# EAGLE board board (EAGLE 6.6.0)
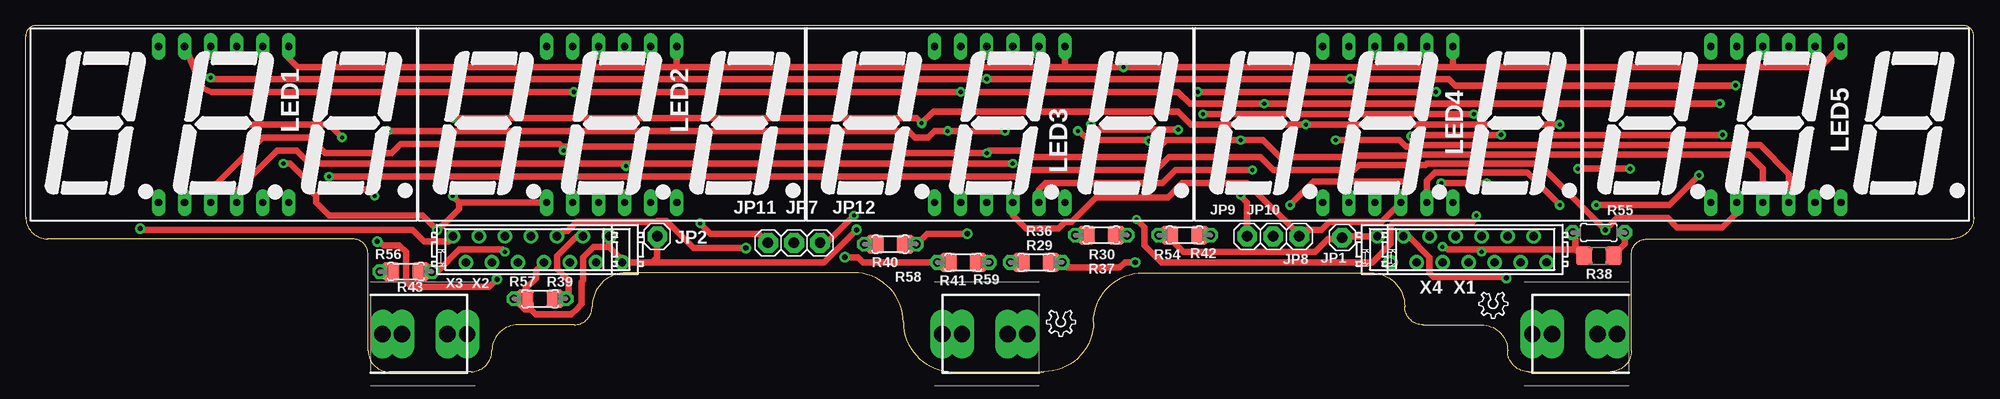
[diagram p0: board, top side]
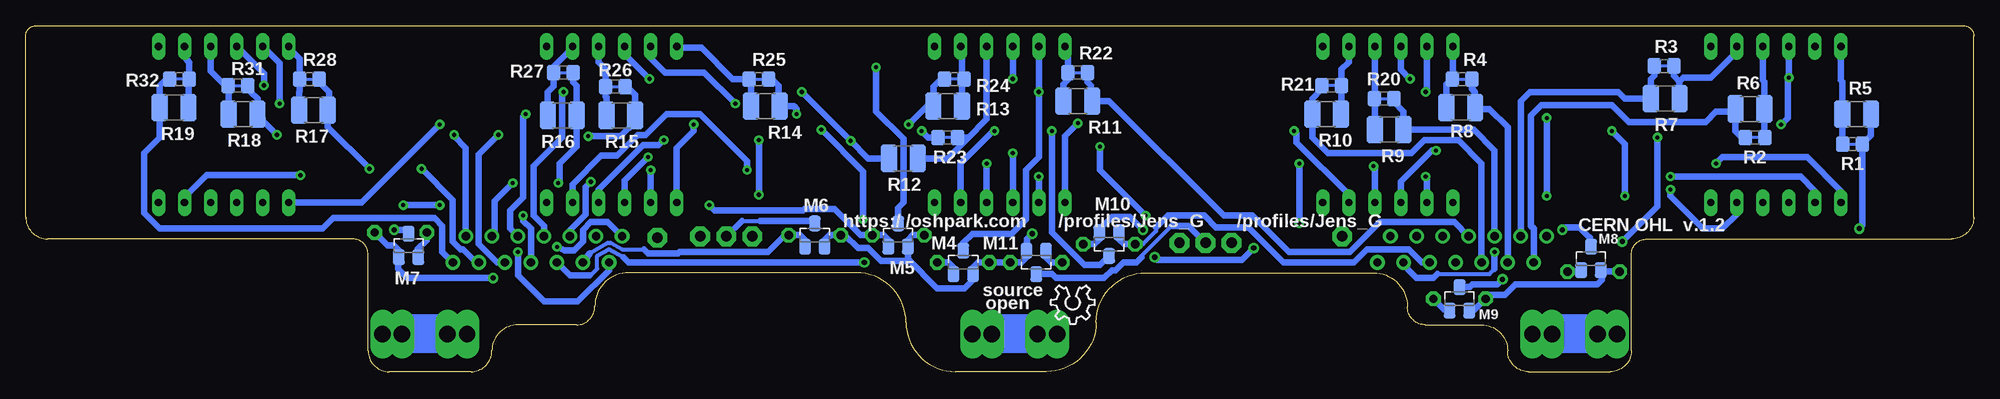
[diagram p1: board, bottom side, seen from below]

Size 189.99 x 33.78 mm. Coordinates in mm from the lower left corner, seen from the top.
Outline: 189.99,32.77 arc90 188.98,33.78 1.02,33.78 arc90 0,32.77 0,15.11 arc90 2.16,12.95 31.88,12.95 arc-90 33.4,11.43 33.4,2.03 arc90 35.43,0 43.43,0 arc90 45.47,2.03 arc-90 48.01,4.57 53.47,4.57 arc90 55.25,6.35 arc-90 58.55,9.65 80.77,9.65 arc-90 85.6,4.83 arc90 90.42,0 99.31,0 arc90 104.14,4.83 arc-90 108.97,9.65 131.19,9.65 arc-90 134.49,6.35 arc90 136.27,4.57 141.99,4.57 arc-90 144.53,2.03 arc90 146.56,0 154.56,0 arc90 156.59,2.03 156.59,11.43 arc-90 158.12,12.95 187.83,12.95 arc90 189.99,15.11 189.99,32.77
Copper layers (1*16): Top 0.035mm / dielectric 1.5mm / Bottom 0.035mm
Design rules "OSHPark-8mil-2layer": minimum track width 10mil, minimum drill 15mil, track to track 8mil, track to pad 8mil, pad to pad 8mil, via to via 8mil, smd to smd 8mil, copper to edge 8mil, drill to drill 8mil, minimum pad ring 12mil, minimum via ring 10mil, stop-mask expansion 4mil, vias tented up to drill 20mil, thermal gap 10mil

## Footprints (pad centres in the part's own frame; a part is rotated, then mirrored left to right if it is on the bottom)
BATTERY-AAA-LEFT = drill 1.6 long: P1 -2.413,0; P2 3.937,0; P3 2.032,0; P4 -4.318,0
BATTERY-AAA-RIGHT = drill 1.6 long: M1 -3.937,0; M2 2.413,0; M3 4.318,0; M4 -2.032,0
1X01 = drill 1.016 pad 1.93 octagon: 1 0,0
BX56-12 = drill 0.7 pad 1.27 long: 1 -6.35,-7.62; 2 -3.81,-7.62; 3 -1.27,-7.62; 4 1.27,-7.62; 5 3.81,-7.62; 6 6.35,-7.62; 7 6.35,7.62; 8 3.81,7.62; 9 1.27,7.62; 10 -1.27,7.62; 11 -3.81,7.62; 12 -6.35,7.62
SOT-23 = smd 1.143 x 1.524: 1 0.953,1.143; 2 -0.953,1.143; 3 0,-1.143
R0805 = smd 1.3 x 1.5: 1 -0.95,0; 2 0.95,0
R1210 = smd 1.6 x 2.7: 1 -1.4,0; 2 1.4,0
0204/5 = drill 0.813 octagon: 1 -2.54,0; 2 2.54,0
R1206 = smd 1.6 x 1.803: 1 -1.422,0; 2 1.422,0
MICROMATCH-12 = drill 0.813: 1 6.985,-1.27; 2 5.715,1.27; 3 4.445,-1.27; 4 3.175,1.27; 5 1.905,-1.27; 6 0.635,1.27; 7 -0.635,-1.27; 8 -1.905,1.27; 9 -3.175,-1.27; 10 -4.445,1.27; 11 -5.715,-1.27; 12 -6.985,1.27
MICROMATCH-14 = drill 0.813: 1 8.255,-1.27; 2 6.985,1.27; 3 5.715,-1.27; 4 4.445,1.27; 5 3.175,-1.27; 6 1.905,1.27; 7 0.635,-1.27; 8 -0.635,1.27; 9 -1.905,-1.27; 10 -3.175,1.27; 11 -4.445,-1.27; 12 -5.715,1.27; 13 -6.985,-1.27; 14 -8.255,1.27

## Placement (x,y rotation side)
BH4  HOLDER_AAA_LEFT1  [BATTERY-AAA-LEFT]  151.26,3.68 0 top
BH5  HOLDER_AAA_LEFT1  [BATTERY-AAA-LEFT]  93.73,3.68 0 top
BH6  HOLDER_AAA_RIGHT  [BATTERY-AAA-RIGHT]  38.73,3.68 0 top
JP1  [1X01]  128.4,13.08 0 top
JP2  [1X01]  61.59,13.21 0 top
JP7  [1X01]  74.93,12.57 0 top
JP8  [1X01]  124.21,13.21 0 top
JP9  [1X01]  119.13,13.21 0 top
JP10  [1X01]  121.67,13.21 0 top
JP11  [1X01]  72.39,12.57 0 top
JP12  [1X01]  77.47,12.57 0 top
LED1  BC56-12SRWA  [BX56-12]  19.3,24.13 0 top
LED2  BC56-12SRWA  [BX56-12]  57.15,24.13 0 top
LED3  BC56-12SRWA  [BX56-12]  95,24.13 0 top
LED4  BC56-12SRWA  [BX56-12]  132.84,24.13 0 top
LED5  BC56-12SRWA  [BX56-12]  170.69,24.13 0 top
LOGO1  OSHW_LOGO_8MILX0150-NT  [OSHW_8X150_NOTEXT]  85.75,8.43 180 bottom
LOGO2  OSHW_LOGO_6MILX0100-NT  [OSHW_6X100_NOTEXT]  102.36,5.97 180 top
LOGO3  OSHW_LOGO_6MILX0100-NT  [OSHW_6X100_NOTEXT]  144.53,7.75 180 top
M4  IRLML2244  [SOT-23]  98.55,10.67 180 bottom
M5  IRLML2244  [SOT-23]  104.9,13.34 180 bottom
M6  IRLML2244  [SOT-23]  113.03,13.34 180 bottom
M7  IRLML2244  [SOT-23]  152.65,12.32 180 bottom
M8  IRLML2244  [SOT-23]  37.34,11.05 180 bottom
M9  IRLML2244  [SOT-23]  50.17,7.11 180 bottom
M10  IRLML2244  [SOT-23]  84.33,12.45 0 bottom
M11  IRLML2244  [SOT-23]  91.44,10.67 0 bottom
R1  22  [R0805]  11.81,22.23 0 bottom
R2  22  [R0805]  21.34,22.86 180 bottom
R3  22  [R0805]  30.23,29.84 180 bottom
R4  22  [R0805]  49.91,28.57 0 bottom
R5  22  [R1210]  11.43,25.15 0 bottom
R6  22  [R1210]  21.84,25.65 180 bottom
R7  22  [R1210]  30.1,26.67 180 bottom
R8  22  [R1210]  50.04,25.78 0 bottom
R9  22  [R1210]  57.02,23.62 0 bottom
R10  22  [R1210]  63.12,25.15 180 bottom
R11  22  [R1210]  87.38,26.42 0 bottom
R12  22  [R1210]  104.39,20.83 180 bottom
R13  22  [R1210]  100.08,25.91 180 bottom
R14  22  [R1210]  117.86,25.91 0 bottom
R15  22  [R1210]  131.95,25.02 0 bottom
R16  22  [R1210]  137.67,25.02 0 bottom
R17  22  [R1210]  161.93,25.53 0 bottom
R18  22  [R1210]  168.78,25.15 0 bottom
R19  22  [R1210]  175.51,25.78 180 bottom
R20  22  [R0805]  57.53,26.67 0 bottom
R21  22  [R0805]  62.61,27.94 180 bottom
R22  22  [R0805]  87.38,29.21 0 bottom
R23  22  [R0805]  100.08,22.86 180 bottom
R24  22  [R0805]  99.44,28.57 180 bottom
R25  22  [R0805]  118.49,28.57 0 bottom
R26  22  [R0805]  132.46,27.81 0 bottom
R27  22  [R0805]  137.54,29.21 0 bottom
R28  22  [R0805]  162.31,28.57 0 bottom
R29  3k3  [0204/5]  98.55,10.67 0 top
R30  3k3  [0204/5]  104.9,13.34 0 top
R31  22  [R0805]  169.29,27.94 0 bottom
R32  22  [R0805]  175.01,28.57 180 bottom
R36  3k3  [R1206]  98.55,10.67 0 top
R37  3k3  [R1206]  104.9,13.34 0 top
R38  3k3  [R1206]  153.42,11.3 0 top
R39  3k3  [R1206]  50.17,7.11 0 top
R40  3k3  [R1206]  84.33,12.45 180 top
R41  3k3  [R1206]  91.44,10.67 180 top
R42  3k3  [R1206]  113.03,13.34 0 top
R43  3k3  [R1206]  37.08,9.78 0 top
R54  3k3  [0204/5]  113.03,13.34 0 top
R55  3k3  [0204/5]  153.42,13.59 0 top
R56  3k3  [0204/5]  37.08,9.78 0 top
R57  3k3  [0204/5]  50.17,7.11 0 top
R58  3k3  [0204/5]  84.33,12.45 180 top
R59  3k3  [0204/5]  91.44,10.67 180 top
X1  MICROMATCH-12  [MICROMATCH-12]  141.35,11.94 180 top
X2  MICROMATCH-14  [MICROMATCH-14]  49.91,11.94 180 top
X3  MICROMATCH-12  [MICROMATCH-12]  48.64,11.94 180 top
X4  MICROMATCH-14  [MICROMATCH-14]  140.08,11.94 180 top

## Library data of the parts
BH4-BH6 = SparkFun-Electromechanical
JP1 JP2 JP7-JP12 = adafruit
LED1-LED5 = display-kingbright-1
LOGO1-LOGO3 = ohw-logo
M4-M11 = IRLML6402
R1-R32 R36-R43 R54-R59 = rcl
X1 X3 = Con-amp-micromatch; MF: FARNELL; MPN: 8-215464-2; OC_FARNELL: 3784666; OC_NEWARK: 95H9857
X2 X4 = Con-amp-micromatch; MF: FARNELL; MPN: 8-215464-4; OC_FARNELL: 3784678; OC_NEWARK: 19J6431

## Nets
CA_LED: JP1.1 JP2.1 M4.2 M5.2 M6.2 M7.2 M8.2 M9.2 M10.2 M11.2 R29.1 R30.1 R36.1 R37.1 R38.1 R39.1 R40.1 R41.1 R42.1 R43.1 R54.1 R55.1 R56.1 R57.1 R58.1 R59.1 X2.8 X2.13 X2.14 X3.8 X4.1 X4.2
D0_A: R1.2 R5.2 X2.1 X3.1
D1_A: R2.2 R6.2 X2.2 X3.2
D2_A: R3.2 R7.2 X2.3 X3.3
D3_A: R4.2 R8.2 X2.4 X3.4
D4_A: R9.2 R20.2 X2.5 X3.5
D5_A: R10.2 R21.2 X2.6 X3.6
D6_A: R11.2 R22.2 X2.7 X3.7
D7_A: R12.2 R23.2 X1.5 X4.7
D8_A: R13.2 R24.2 X1.6 X4.8
D9_A: R14.2 R25.2 X1.7 X4.9
D10_A: R15.2 R26.2 X1.8 X4.10
D11_A: R16.2 R27.2 X1.9 X4.11
D12_A: R17.2 R28.2 X1.10 X4.12
D13_A: R18.2 R31.2 X1.11 X4.13
D14_A: R19.2 R32.2 X1.12 X4.14
DIG_0: LED1.12 R1.1 R5.1
DIG_1: LED1.9 R2.1 R6.1
DIG_2: LED1.8 R3.1 R7.1
DIG_3: LED2.12 R4.1 R8.1
DIG_4: LED2.9 R9.1 R20.1
DIG_5: LED2.8 R10.1 R21.1
DIG_6: LED3.12 R11.1 R22.1
DIG_7: LED3.9 R12.1 R23.1
DIG_8: LED3.8 R13.1 R24.1
DIG_9: LED4.12 R14.1 R25.1
DIG_10: LED4.9 R15.1 R26.1
DIG_11: LED4.8 R16.1 R27.1
DIG_12: LED5.12 R17.1 R28.1
DIG_13: LED5.9 R18.1 R31.1
DIG_14: LED5.8 R19.1 R32.1
IO-A: M4.1 R29.2 R36.2 X1.4 X4.6
IO-B: M5.1 R30.2 R37.2 X1.3 X4.5
IO-C: M6.1 R42.2 R54.2 X1.2 X4.4
IO-D: M7.1 R38.2 R55.2 X1.1 X4.3
IO-DP: M11.1 R41.2 R59.2 X2.9 X3.9
IO-E: M8.1 R43.2 R56.2 X2.12 X3.12
IO-F: M9.1 R39.2 R57.2 X2.11 X3.11
IO-G: M10.1 R40.2 R58.2 X2.10 X3.10
NC1: BH4.P1 BH4.P2 BH4.P3 BH4.P4
NC2: BH5.P1 BH5.P2 BH5.P3 BH5.P4
NC3: BH6.M1 BH6.M2 BH6.M3 BH6.M4
SEG_A: LED1.11 LED2.11 LED3.11 LED4.11 LED5.11 M4.3
SEG_B: LED1.7 LED2.7 LED3.7 LED4.7 LED5.7 M5.3
SEG_C: JP8.1 JP11.1 LED1.4 LED2.4 LED3.4 LED4.4 LED5.4
SEG_C_SOURCE: JP10.1 M6.3
SEG_D: LED1.2 LED2.2 LED3.2 LED4.2 LED5.2 M7.3
SEG_DP: JP9.1 JP12.1 LED1.3 LED2.3 LED3.3 LED4.3 LED5.3
SEG_DP_SOURCE: JP7.1 M11.3
SEG_E: LED1.1 LED2.1 LED3.1 LED4.1 LED5.1 M8.3
SEG_F: LED1.10 LED2.10 LED3.10 LED4.10 LED5.10 M9.3
SEG_G: LED1.5 LED2.5 LED3.5 LED4.5 LED5.5 M10.3

## Tracks (layer width: path | path; a pad name or v marks a point on that pad's centre or on a via)
CA_LED  (via drill 0.41, 0.51)
  Top 0.254: 49.28,7.62 R39.1
  Top 0.406: 53.72,6.22 53.72,6.1 | 124.84,11.81 124.84,11.68
  Top 0.61: R43.1 R56.1 | 61.09,10.67 77.85,10.67 v81.03,13.84 | 61.09,10.67 X2.14 58.17,10.92 56.9,12.19 | R36.1 R29.1 | R37.1 103.48,13.36 103.38,13.46 102.49,13.46 R30.1 | R54.1 111.23,13.31 R42.1 111.78,13.17 111.78,12.79 112.89,11.68 124.84,11.68 125.73,11.68 127,12.95 127.76,12.95 | 56.9,12.19 55.37,12.19 54.36,11.18 54.36,8.89 54.23,8.76 54.23,6.6 53.72,6.1 53.21,5.59 49.73,5.59 49.23,6.1 48.64,6.1 R57.1 R39.1 | X4.1 127.76,13.21 127.76,12.95 | JP2.1 61.59,11.18 61.09,10.67 | R58.1 R40.1 | R58.1 86.28,12.45 | 49.23,6.63 R39.1 | 48.64,7.21 R39.1 | R41.1 R59.1 | v91.82,13.46 87.88,13.46 R58.1 | v138.18,12.19 138.68,11.94 141.99,11.94 | 127.76,12.95 128.27,12.95 JP1.1 | X2.8 49.78,9.91 49.78,9.12 48.77,8.11 48.77,7.14 R39.1 | 141.99,11.94 151.13,11.94 | 151.13,11.94 151.38,11.68 151.61,11.68 R38.1 | 151.13,11.94 151.13,13.34 R55.1 | 56.9,12.19 X2.13 | v141.99,11.68 141.99,11.94
  Bottom 0.254: M8.2 35.92,9.91 35.92,9.78
  Bottom 0.61: M8.2 36.27,9.7 36.27,8.94 36.7,8.51 44.7,8.51 45.72,7.49 47.24,7.49 R57.1 48.64,6.1 M9.2 | v81.03,13.84 82.3,15.11 84.07,15.11 85.27,13.92 M10.2 85.27,12.93 R40.1 R58.1 85.85,12.45 | 36.14,9.78 35.92,9.78 R56.1 | R30.1 R37.1 103.96,12.85 M5.2 103.96,12.31 103.96,11 | 103.96,11 101.09,8.13 98.42,8.13 97.66,8.89 97.66,9.6 M4.2 97.61,10.19 R36.1 R29.1 R59.1 R41.1 92.38,11.15 M11.2 92.33,11.73 92.33,12.95 v91.82,13.46 | 111.45,13.28 R54.1 | 103.96,11 104.16,10.79 106.55,10.79 107.82,12.06 108.84,12.06 110.11,13.34 R54.1 | v138.18,12.19 137.41,11.81 136.53,11.81 135.64,12.7 135.64,13.84 134.87,14.61 133.22,14.61 X4.1 | v141.99,11.68 141.99,9.4 139.45,6.86 136.14,6.86 133.1,9.91 X4.2 | 151.64,11.3 M7.2 151.74,11.3 151.74,11.96 150.88,12.83 R55.1 | M6.2 112.08,12.87 R42.1 R54.1
D0_A  (via drill 0.51)
  Top 0.406: 41.4,12.95 41.53,12.95
  Top 0.61: v11.18,13.97 11.3,13.84 37.72,13.84 38.86,12.7 41.27,12.7 41.53,12.95 41.78,13.21 X2.1
  Bottom 0.61: R5.2 10.03,23.06 R1.2 10.86,14.29 v11.18,13.97
D1_A
  Bottom 0.61: X2.2 42.93,13.97 43.18,14.22 43.18,25.02 42.16,26.04 35.31,26.04 33.66,24.38 26.16,24.38 25.15,25.4 23.5,25.4 R6.2 23.24,25.02 23.24,23.5 22.61,22.86 R2.2
D2_A
  Bottom 0.61: R7.2 31.5,26.03 | X2.3 44.2,26.42 43.31,27.3 34.67,27.3 34.04,26.67 R7.2 | R3.2 31.18,28.89 31.5,28.57 R7.2
D3_A
  Bottom 0.61: X2.4 45.47,23.88 47.24,25.65 48.51,25.65 R8.2 | R8.2 48.64,25.4 | R4.2 48.96,27.62 48.64,27.3 R8.2
D4_A
  Bottom 0.61: X2.5 46.74,21.59 48.77,23.62 R9.2 55.63,25.4 56.58,26.36 R20.2
D5_A
  Bottom 0.61: X2.6 48.01,20.32 50.29,22.61 53.59,22.61 54.86,21.34 62.99,21.34 64.52,22.86 R10.2 64.52,26.67 63.56,27.62 R21.2
D6_A
  Bottom 0.61: R22.2 86.43,28.26 86.11,27.94 86.11,26.55 R11.2 84.33,26.42 73.15,15.24 70.36,15.24 66.8,11.68 60.83,11.68 57.91,14.61 50.67,14.61 X2.7
D7_A  (via drill 0.41)
  Top 0.61: v137.54,27.3 v114.3,27.3 | v102.62,23.5 102.74,23.5 103.63,22.61 109.47,22.61 v109.54,22.54
  Bottom 0.61: v114.3,27.3 v109.54,22.54 107.82,20.83 R12.2 | R23.2 101.98,22.86 v102.62,23.5 | X4.7 139.45,14.22 140.46,15.24 140.46,20.07 137.67,22.86 137.67,27.18 v137.54,27.3
D8_A  (via drill 0.41)
  Top 0.61: v108.33,14.86 109.09,14.1 109.09,12.32 110.74,10.67 131.32,10.67 133.1,12.45 133.1,14.22 133.48,14.61 141.1,14.61 141.48,14.99 v141.48,15.24 | v112.39,23.62 104.39,23.62 v103.89,24.13
  Bottom 0.61: v108.33,14.86 108.33,19.56 v112.39,23.62 | v103.89,24.13 102.11,25.91 R13.2 101.48,27.81 100.71,28.57 R24.2 | X4.8 140.72,13.97 141.48,14.73 v141.48,15.24
D9_A  (via drill 0.41)
  Top 0.61: v141.22,25.15 v114.81,25.15
  Bottom 0.61: R14.2 116.46,25.78 | v114.81,25.15 114.81,25.65 115.06,25.91 R14.2 | R25.2 117.22,28.57 116.59,27.94 116.59,26.04 R14.2 | v141.22,25.15 141.48,24.89 141.48,17.02 142.75,15.75 142.75,13.97 X4.9
D10_A  (via drill 0.41)
  Top 0.61: v143.89,23.11 135.25,23.11 v135.13,22.99
  Bottom 0.61: R26.2 131.32,27.81 130.55,27.05 R15.2 130.55,24.39 131.95,22.99 v135.13,22.99 | X4.10 144.02,10.67 145.8,12.45 145.8,21.21 v143.89,23.11
D11_A  (via drill 0.41)
  Top 0.61: v142.49,18.41 v138.05,18.41
  Bottom 0.61: R27.2 136.59,28.26 136.27,27.94 R16.2 | R16.2 | R16.2 136.27,21.97 137.92,20.32 137.92,18.54 v138.05,18.41 | v142.49,18.41 144.27,16.64 144.27,13.46 X4.11
D12_A  (via drill 0.41)
  Top 0.61: v151.38,19.81 v156.46,19.81
  Bottom 0.61: R28.2 161.36,28.26 160.4,27.3 160.4,25.65 R17.2 160.53,23.87 v156.46,19.81 | X4.12 146.05,10.67 147.32,11.94 147.57,11.94 148.34,12.7 148.34,16.76 v151.38,19.81
D13_A  (via drill 0.41)
  Top 0.61: v148.21,23.11 v165.48,23.11
  Bottom 0.61: R18.2 167.26,25.15 | 166.88,24.64 R18.2 | X4.13 147.07,21.84 148.21,22.99 v148.21,23.11 | R31.2 168.02,27.94 168.02,27.3 167.39,26.67 R18.2 | R18.2 167.39,24.77 167.13,24.77 v165.48,23.11
D14_A
  Bottom 0.61: R32.2 176.28,28.57 176.91,27.94 R19.2 176.91,22.86 178.44,21.34 178.44,15.49 176.91,13.97 161.04,13.97 160.02,14.99 150.11,14.99 149.35,14.22 149.35,11.68 X4.14
DIG_0
  Bottom 0.61: LED1.12 12.95,28.45 12.83,28.32 R5.1 12.83,22.29 R1.1
DIG_1
  Bottom 0.61: LED1.9 20.57,28.45 20.44,28.32 R6.1 20.44,23.55 R2.1
DIG_2
  Bottom 0.61: R7.1 28.7,28.32 | 28.7,28.32 28.32,28.7 25.65,28.7 23.11,31.24 LED1.8 | R3.1 29.28,28.9 28.7,28.32
DIG_3
  Bottom 0.61: R8.1 51.44,28.06 51.05,28.45 50.8,28.83 | LED2.12 50.8,28.83 | R4.1 50.8,28.83
DIG_4
  Bottom 0.61: R9.1 58.42,25.4 58.42,25.65 58.42,26.48 | LED2.9 58.42,26.48 | 58.42,26.48 R20.1
DIG_5
  Bottom 0.61: R10.1 61.34,25.52 61.34,26.04 61.66,26.36 R21.1 61.66,29.52 60.96,30.23 LED2.8
DIG_6
  Bottom 0.61: R11.1 88.78,28.06 88.33,28.51 R22.1 88.33,31.43 LED3.12
DIG_7
  Bottom 0.61: 98.11,22.8 96.27,24.64 LED3.9 | 98.11,22.8 100.08,20.83 R12.1 | R23.1 98.17,22.86 98.11,22.8
DIG_8
  Bottom 0.61: R13.1 98.68,28.76 | 98.68,28.76 R24.1 | 98.68,28.76 98.68,31.62 LED3.8
DIG_9
  Bottom 0.61: R14.1 119.26,28.39 R25.1 | R25.1 119.44,28.25 119.38,28.19 | LED4.12 126.11,31.62 124.08,31.62 121.03,28.57 R25.1
DIG_10
  Bottom 0.61: R15.1 133.35,26.8 133.41,26.86 R26.1 133.41,29.52 134.11,30.23 LED4.9
DIG_11
  Bottom 0.61: R16.1 139.07,27.3 138.49,27.88 R27.1 138.49,29.78 136.65,31.62 LED4.8
DIG_12
  Bottom 0.61: 162.94,24.64 163.07,24.77 163.07,25.27 R17.1 163.33,27.3 163.26,27.37 R28.1 163.26,30.54 164.34,31.62 LED5.12
DIG_13
  Bottom 0.61: LED5.9 171.96,29.34 170.18,27.56 | R18.1 170.18,27.56 | 170.18,27.56 170.18,27.88 R31.1
DIG_14
  Bottom 0.61: R19.1 174.11,27.94 173.93,28.13 | 173.93,28.13 173.74,28.32 | LED5.8 174.5,30.73 174.06,30.16 R32.1 174.06,28.26 173.93,28.13
IO-A  (via drill 0.51)
  Top 0.61: R36.2 R29.2 101.6,10.16 106.68,10.16 107.19,10.67 v108.2,10.67
  Bottom 0.406: 131.7,11.18 133.1,11.94 134.24,11.3 134.24,10.03 134.87,9.4 135,9.4
  Bottom 0.61: M4.1 99.49,10.19 R36.2 R29.2 | v108.2,10.67 131.19,10.67 131.7,11.18 | 135,9.4 136.91,9.4 X4.6
IO-B  (via drill 0.41)
  Top 0.61: R37.2 R30.2 | v134.87,18.54 125.6,18.54 v123.32,16.26
  Bottom 0.61: M5.1 105.84,12.85 R37.2 R30.2 108.58,13.34 111.12,15.88 114.05,15.88 114.17,15.75 122.81,15.75 v123.32,16.26 | X4.5 136.91,13.84 135.38,15.37 135.38,18.03 v134.87,18.54
IO-C
  Top 0.61: R42.2 115.09,13.31 R54.2
  Bottom 0.406: 129.67,11.94 131.83,11.94 132.97,12.57 133.22,12.57 135,11.56
  Bottom 0.61: 115.19,13.31 115.59,13.31 | 115.59,13.31 115.68,13.31 R54.2 R42.2 113.98,12.87 M6.1 | 115.59,13.31 116.1,13.19 117.6,11.68 126.24,11.68 126.36,11.56 129.29,11.56 129.67,11.94 | 135,11.56 X4.4
IO-D  (via drill 0.51 pad 0.25)
  Top 0.61: X4.3 134.87,13.21 136.91,11.18 136.91,9.65 137.29,9.27 144.27,9.27 v144.4,9.14 | R38.2 154.84,11.33 155.96,12.45 R55.2
  Bottom 0.61: v144.4,9.14 152.78,9.14 153.67,10.03 153.67,10.72 153.72,11.3 M7.1 153.61,11.87 154.05,12.32 154.69,12.32 R55.2 155.83,13.46
IO-DP  (via drill 0.51, 0.51 pad 0.25)
  Top 0.406: 61.59,14.73 60.71,14.73 60.58,14.61
  Top 0.61: R41.2 R59.2 81.66,10.67 81.15,11.18 v79.88,11.18 | v70.23,12.06 65.15,12.06 62.48,14.73 61.59,14.73 | 60.58,14.61 53.72,14.61 52.83,13.72 52.32,13.72 X2.9
  Bottom 0.61: R59.2 R41.2 90.49,11.14 M11.1 | v79.88,11.18 79.63,10.92 71.37,10.92 v70.23,12.06
IO-E  (via drill 0.4)
  Top 0.61: R43.2 R56.2 40,9.91 40.26,9.91 42.29,11.94 46.48,11.94 v46.74,11.68
  Bottom 0.406: 52.32,9.53 47.24,9.53 46.74,10.03
  Bottom 0.61: R56.2 38.79,9.78 M8.1 | 52.32,9.53 52.7,9.14 54.36,9.14 55.63,10.41 X2.12 | 46.74,10.03 v46.74,11.68
IO-F
  Top 0.61: R39.2 R57.2 52.96,7.37 52.96,8.89 51.82,10.03 51.82,11.3 53.72,13.21 X2.11
  Bottom 0.61: M9.1 51.69,6.1 R57.2
IO-G
  Top 0.61: R40.2 R58.2
  Bottom 0.406: R58.2 81.03,12.45 79.76,13.72 79.76,14.1
  Bottom 0.61: 79.76,14.1 78.61,15.24 75.06,15.24 73.91,14.1 70.74,14.1 67.31,10.67 60.45,10.67 59.18,11.94 55.12,11.94 53.85,10.67 X2.10 | M10.1 83.39,12.93 R40.2 R58.2
NC1
  Bottom 0.61: BH4.P1 148.59,3.68 | BH4.P2 155.07,3.68
  Bottom 2.184: 148.72,3.68 148.59,3.68 BH4.P4 | BH4.P3 155.07,3.68
  Bottom 3.81: 148.72,3.68 BH4.P1 BH4.P3
NC2
  Bottom 0.61: BH5.P2 97.54,3.68
  Bottom 2.184: 91.19,3.68 BH5.P4 | BH5.P3 97.54,3.68
  Bottom 3.81: 91.19,3.68 BH5.P1 BH5.P3
NC3
  Bottom 0.61: 34.92,3.68 BH6.M1
  Bottom 2.184: 34.92,3.68 BH6.M4 | 41.27,3.68 BH6.M3
  Bottom 3.81: BH6.M4 BH6.M2 41.27,3.68
SEG_A  (via drill 0.41)
  Top 0.61: v165.23,26.16 v120.78,26.16 113.54,26.16 112.39,27.3 v91.19,27.3 v53.47,27.3 18.16,27.3 17.27,27.69 LED1.11
  Bottom 0.61: M4.3 98.58,11.71 98.58,12.55 97.66,13.46 93.85,13.46 92.46,14.86 92.46,19.68 91.19,20.95 v91.19,27.3 LED3.11 | LED2.11 53.34,27.43 v53.47,27.3 | LED4.11 129.03,30.61 127.63,29.21 123.83,29.21 v120.78,26.16 | LED5.11 165.23,30.1 v165.23,26.16
SEG_B  (via drill 0.41)
  Top 0.61: 63.63,29.72 101.35,29.72 | 106.93,29.72 v107.06,29.72 | v107.06,29.72 139.32,29.72 | 139.32,29.72 175.01,29.72 LED5.7 | LED2.7 63.5,29.84 63.63,29.72 | LED1.7 25.65,30.61 26.54,29.72 63.63,29.72 | LED4.7 139.19,29.84 139.32,29.72 | LED3.7 101.35,29.72 | 101.35,29.72 106.93,29.72 | 106.93,29.72 107.06,29.84 v107.06,29.72
  Bottom 0.61: M5.3 104.93,14.38 104.93,15.98 104.39,16.51 104.39,22.73 107.06,25.4 v107.06,29.72
SEG_C  (via drill 0.41)
  Top 0.61: v65.79,14.48 66.8,13.46 71.5,13.46 JP11.1 | LED1.4 20.57,17.65 24.51,21.59 26.42,21.59 27.69,20.32 58.8,20.32 | v58.55,20.07 58.8,20.32 | 58.8,20.32 v65.79,20.32 v96.27,20.32 | LED4.4 132.21,14.61 127.13,14.61 126.36,13.84 124.84,13.84 JP8.1 124.21,13.34 119.13,18.41 112.78,18.41 111.38,17.02 104.39,17.02 102.11,14.73 101.98,14.61 101.35,14.61 100.71,13.97 97.54,13.97 96.27,15.24 LED3.4 | v127.76,22.61 133.99,22.61 134.62,21.97 135.64,21.97 135.76,22.1 169.16,22.1 171.96,19.3 LED5.4
  Bottom 0.61: LED2.4 58.42,19.94 v58.55,20.07 | v65.79,20.32 v65.79,14.48 | LED3.4 v96.27,20.32 | LED4.4 134.11,17.78 129.79,22.1 128.27,22.1 v127.76,22.61
SEG_C_SOURCE
  Bottom 0.406: 120.14,14.73 118.36,14.73
  Bottom 0.61: 120.14,14.73 JP10.1 | M6.3 113.44,14.73 118.36,14.73
SEG_D  (via drill 0.41, 0.51)
  Top 0.61: v29.59,19.05 v53.47,19.05 v91.19,19.05 96.9,19.05 97.54,19.68 110.24,19.68 111.51,20.95 120.4,20.95 121.67,19.68 v129.03,19.68 129.54,19.68 130.05,20.19 136.53,20.19 136.65,20.32 147.57,20.32 v154.05,13.84 155.19,14.99 160.15,14.99 161.04,14.1 165.48,14.1 166.88,15.49 LED5.2
  Bottom 0.61: M7.3 153.03,13.84 v154.05,13.84 | LED1.2 15.49,17.65 16.89,19.05 v29.59,19.05 | LED2.2 53.34,18.92 v53.47,19.05 | LED3.2 v91.19,19.05 | LED4.2 v129.03,19.68
SEG_DP  (via drill 0.41)
  Top 0.61: JP12.1 78.11,12.57 v80.77,15.24 | LED1.3 18.03,17.78 23.11,22.86 27.69,22.86 29.21,21.34 35.69,21.34 36.58,22.23 52.07,22.23 52.32,21.97 | 52.32,21.97 v85.22,21.97 85.85,21.34 v93.73,21.34 93.98,21.59 97.54,21.59 98.17,20.95 109.6,20.95 111.25,22.61 v118.49,22.61 120.65,22.61 122.3,20.95 v129.29,20.95 129.41,20.95 129.54,21.08 136.02,21.08 136.14,21.21 168.02,21.21 169.42,19.81 LED5.3 | 52.32,21.97 52.32,21.72 v52.45,21.59 | v118.49,17.27 118.49,17.14 119.13,16.51 JP9.1
  Bottom 0.61: v52.45,21.59 52.83,21.59 55.88,18.54 LED2.3 | v85.22,21.97 85.22,19.68 v80.77,15.24 | v118.49,22.61 v118.49,17.27 | LED3.3 v93.73,21.34 | LED4.3 131.57,18.67 v129.29,20.95
SEG_DP_SOURCE
  Bottom 0.406: 81.15,11.18 81.15,11.3 78.23,14.22
  Bottom 0.61: M11.3 89.92,9.53 89.53,9.14 84.84,9.14 84.07,9.91 83.69,9.91 82.93,10.67 81.66,10.67 81.15,11.18 | 78.23,14.22 76.58,14.22 JP7.1
SEG_E  (via drill 0.41, 0.51)
  Top 0.61: v149.61,24.13 v124.84,24.13 113.66,24.13 112.39,25.4 88.52,25.4 v87.38,24.26 86.87,24.77 v41.66,24.77 | 25.15,20.19 v25.15,20.32 25.78,20.32 27.69,18.41 27.69,17.78 28.32,17.14 28.32,16.51 29.59,15.24 38.73,15.24 v40.13,13.84 40.51,14.22 40.64,14.22 42.29,15.88 42.29,16.51 | 43.05,16.51 LED2.1 42.29,16.51 | 42.29,16.51 v41.66,17.14
  Bottom 0.254: 37.49,13.11 37.47,13.11
  Bottom 0.61: 37.49,13.11 38.48,14.1 40.13,14.1 v40.13,13.84 | 37.47,13.11 37.47,12.19 M8.3 | v25.15,20.32 24.51,20.95 16.26,20.95 12.95,17.65 LED1.1 | v41.66,17.14 v41.66,24.77 | LED3.1 88.65,22.99 v87.38,24.26 | LED4.1 126.49,21.84 124.84,23.5 v124.84,24.13 | v149.61,24.13 157.23,16.51 LED5.1
SEG_F  (via drill 0.41, 0.51)
  Top 0.61: v34.29,12.7 34.92,12.32 36.45,12.32 37.08,11.68 37.08,8.76 37.59,8.26 45.21,8.26 v45.97,9.02 | v18.8,24.13 29.59,24.13 v30.86,22.86 | v18.03,28.7 18.16,28.57 v54.99,28.57 v93.73,28.57 v129.16,28.57 138.81,28.57 139.45,27.94 v166.75,27.94
  Bottom 0.61: M9.3 49.15,8.26 48.89,8.51 46.48,8.51 v45.97,9.02 | v34.29,12.7 30.86,16.13 v30.86,22.86 | LED1.10 v18.03,28.7 18.16,28.57 18.16,24.77 v18.8,24.13 | LED2.10 55.88,29.46 v54.99,28.57 | LED3.10 v93.73,28.57 | v166.75,27.94 166.75,29.08 LED5.10 | LED4.10 131.57,30.99 v129.16,28.57
SEG_G  (via drill 0.41)
  Top 0.61: v29.59,17.78 33.4,17.78 v34.04,17.14 | v35.31,23.5 v66.29,23.5 86.11,23.5 86.74,22.86 88.01,22.86 88.65,23.5 v89.92,23.5 v95.5,23.5 | LED3.5 98.81,17.78 99.44,18.41 110.87,18.41 112.14,19.68 v119.63,19.68 119.76,19.68 | LED4.5 136.65,18.67 137.41,19.43 146.43,19.43 v149.61,16.26 | v153.16,16.26 160.27,16.26 v163.2,19.18
  Bottom 0.61: 84.3,11.33 M10.3 85.22,10.41 86.74,10.41 89.92,13.59 v89.92,23.5 | LED1.5 23.11,15.37 24.51,13.97 26.42,13.97 29.59,17.14 v29.59,17.78 | v34.04,17.14 34.04,22.23 v35.31,23.5 | LED2.5 60.96,17.27 66.04,22.35 66.04,23.24 v66.29,23.5 | v95.5,23.5 95.63,23.5 98.81,20.32 LED3.5 | LED4.5 136.65,18.29 133.86,21.08 132.33,21.08 130.3,23.11 129.54,23.11 127.51,25.15 124.21,25.15 119.63,20.57 v119.63,19.68 119.63,20.07 | v149.61,16.26 v153.16,16.26 | v163.2,19.18 172.34,19.18 174.24,17.27 174.24,16.76 LED5.5

## Text on the board
bPlace: /profiles/Jens_G | /profiles/Jens_G | https:/ /oshpark.com | CERN OHL v.1.2 | source | open